# EAGLE board demo (EAGLE 9.6.2)
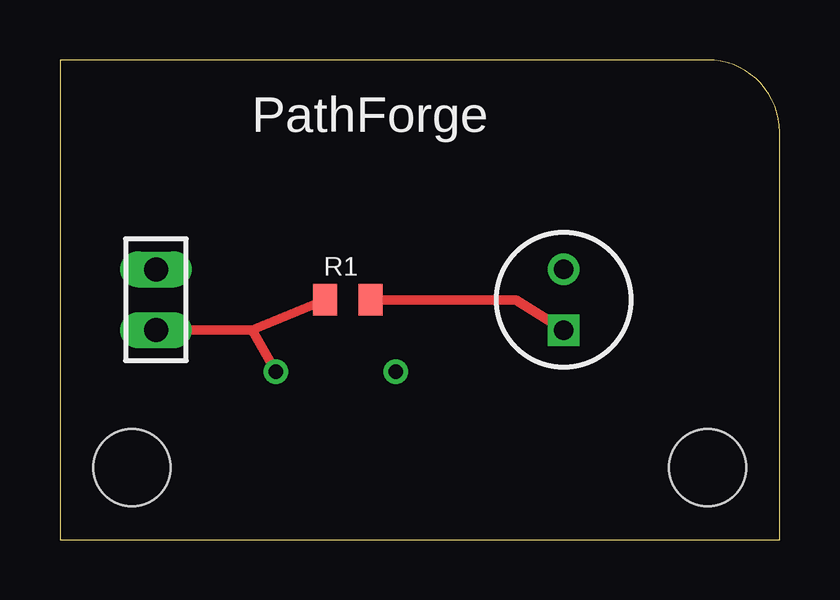
[diagram p0: board, top side]
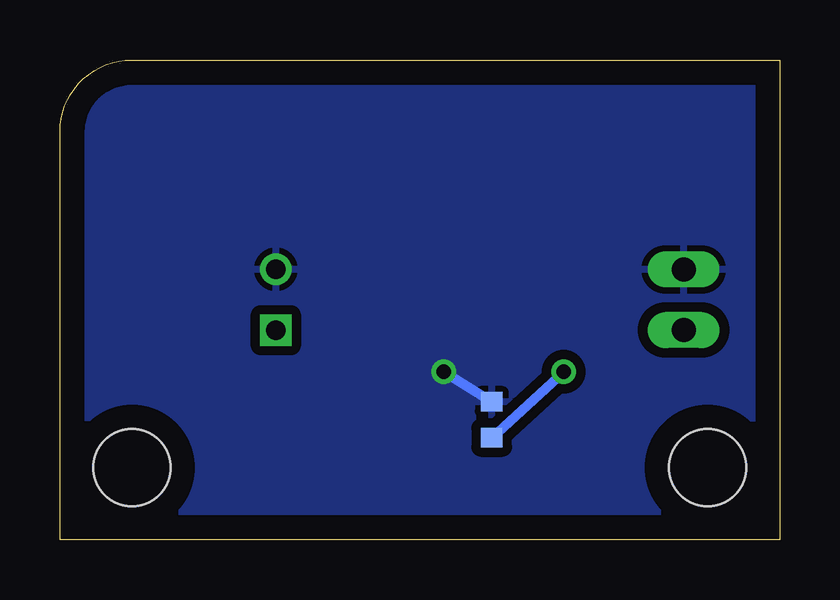
[diagram p1: board, bottom side, seen from below]

Size 30 x 20 mm. Coordinates in mm from the lower left corner, seen from the top.
Outline: 0,0 30,0 30,17 arc90 27,20 0,20 0,0
Copper layers used: Top, Bottom
Design rules "default": track to track 8mil, track to pad 8mil, copper to edge 40mil, minimum pad ring 10mil, minimum via ring 8mil, stop-mask expansion 4mil, vias tented up to drill 100mil
Holes 3.2 mm at 3,3 27,3

## Footprints (pad centres in the part's own frame; a part is rotated, then mirrored left to right if it is on the bottom)
C0603 = smd 0.8 x 0.9: 1 -0.75,0; 2 0.75,0
PINHEAD2 = drill 1 long: 1 0,-1.27; 2 0,1.27
LED5MM = drill 0.8 square: 1 -1.27,0 | drill 0.8: 2 1.27,0
R0805 = smd 1 x 1.3: 1 -0.95,0; 2 0.95,0

## Placement (x,y rotation side)
C1  100n  [C0603]  12,5 90 bottom
J1  [PINHEAD2]  4,10 0 top
LED1  red  [LED5MM]  21,10 90 top
R1  330  [R0805]  12,10 0 top

## Library data of the parts
C1 J1 LED1 R1 = pathforge-demo

## Nets
GND: C1.2 J1.2 LED1.2
N$1: LED1.1 R1.2
VCC: C1.1 J1.1 R1.1

## Tracks (layer width: path | path; a pad name or v marks a point on that pad's centre or on a via)
GND  (via drill 0.6)
  Bottom 0.4: C1.2 v14,7
  pour Bottom (isolate 0.4): 1,1 29,1 29,19 1,19
N$1
  Top 0.4: R1.2 19,10 LED1.1
VCC  (via drill 0.6)
  Top 0.4: J1.1 8,8.73 | 8,8.73 R1.1 | 8,8.73 v9,7
  Bottom 0.4: v9,7 C1.1

## Text on the board
tPlace: PathForge